# Altium PCB Copy of PCB1.PcbDoc (part 8 of 9)
Units mm, origin at the board's own origin, x right, y up, seen from the top; angles counter-clockwise.
Board outline 100 x 100 mm, 6 copper layers (Top Layer, Int1 (GND), Int2 (Sign), Int3 (Sign), Int4 (PWR), Bottom Layer), stack 1.538 mm thick; 614 components, 712 nets, 3013 pads, 501 vias.
Unrouted connection lines stored in the file: 259.
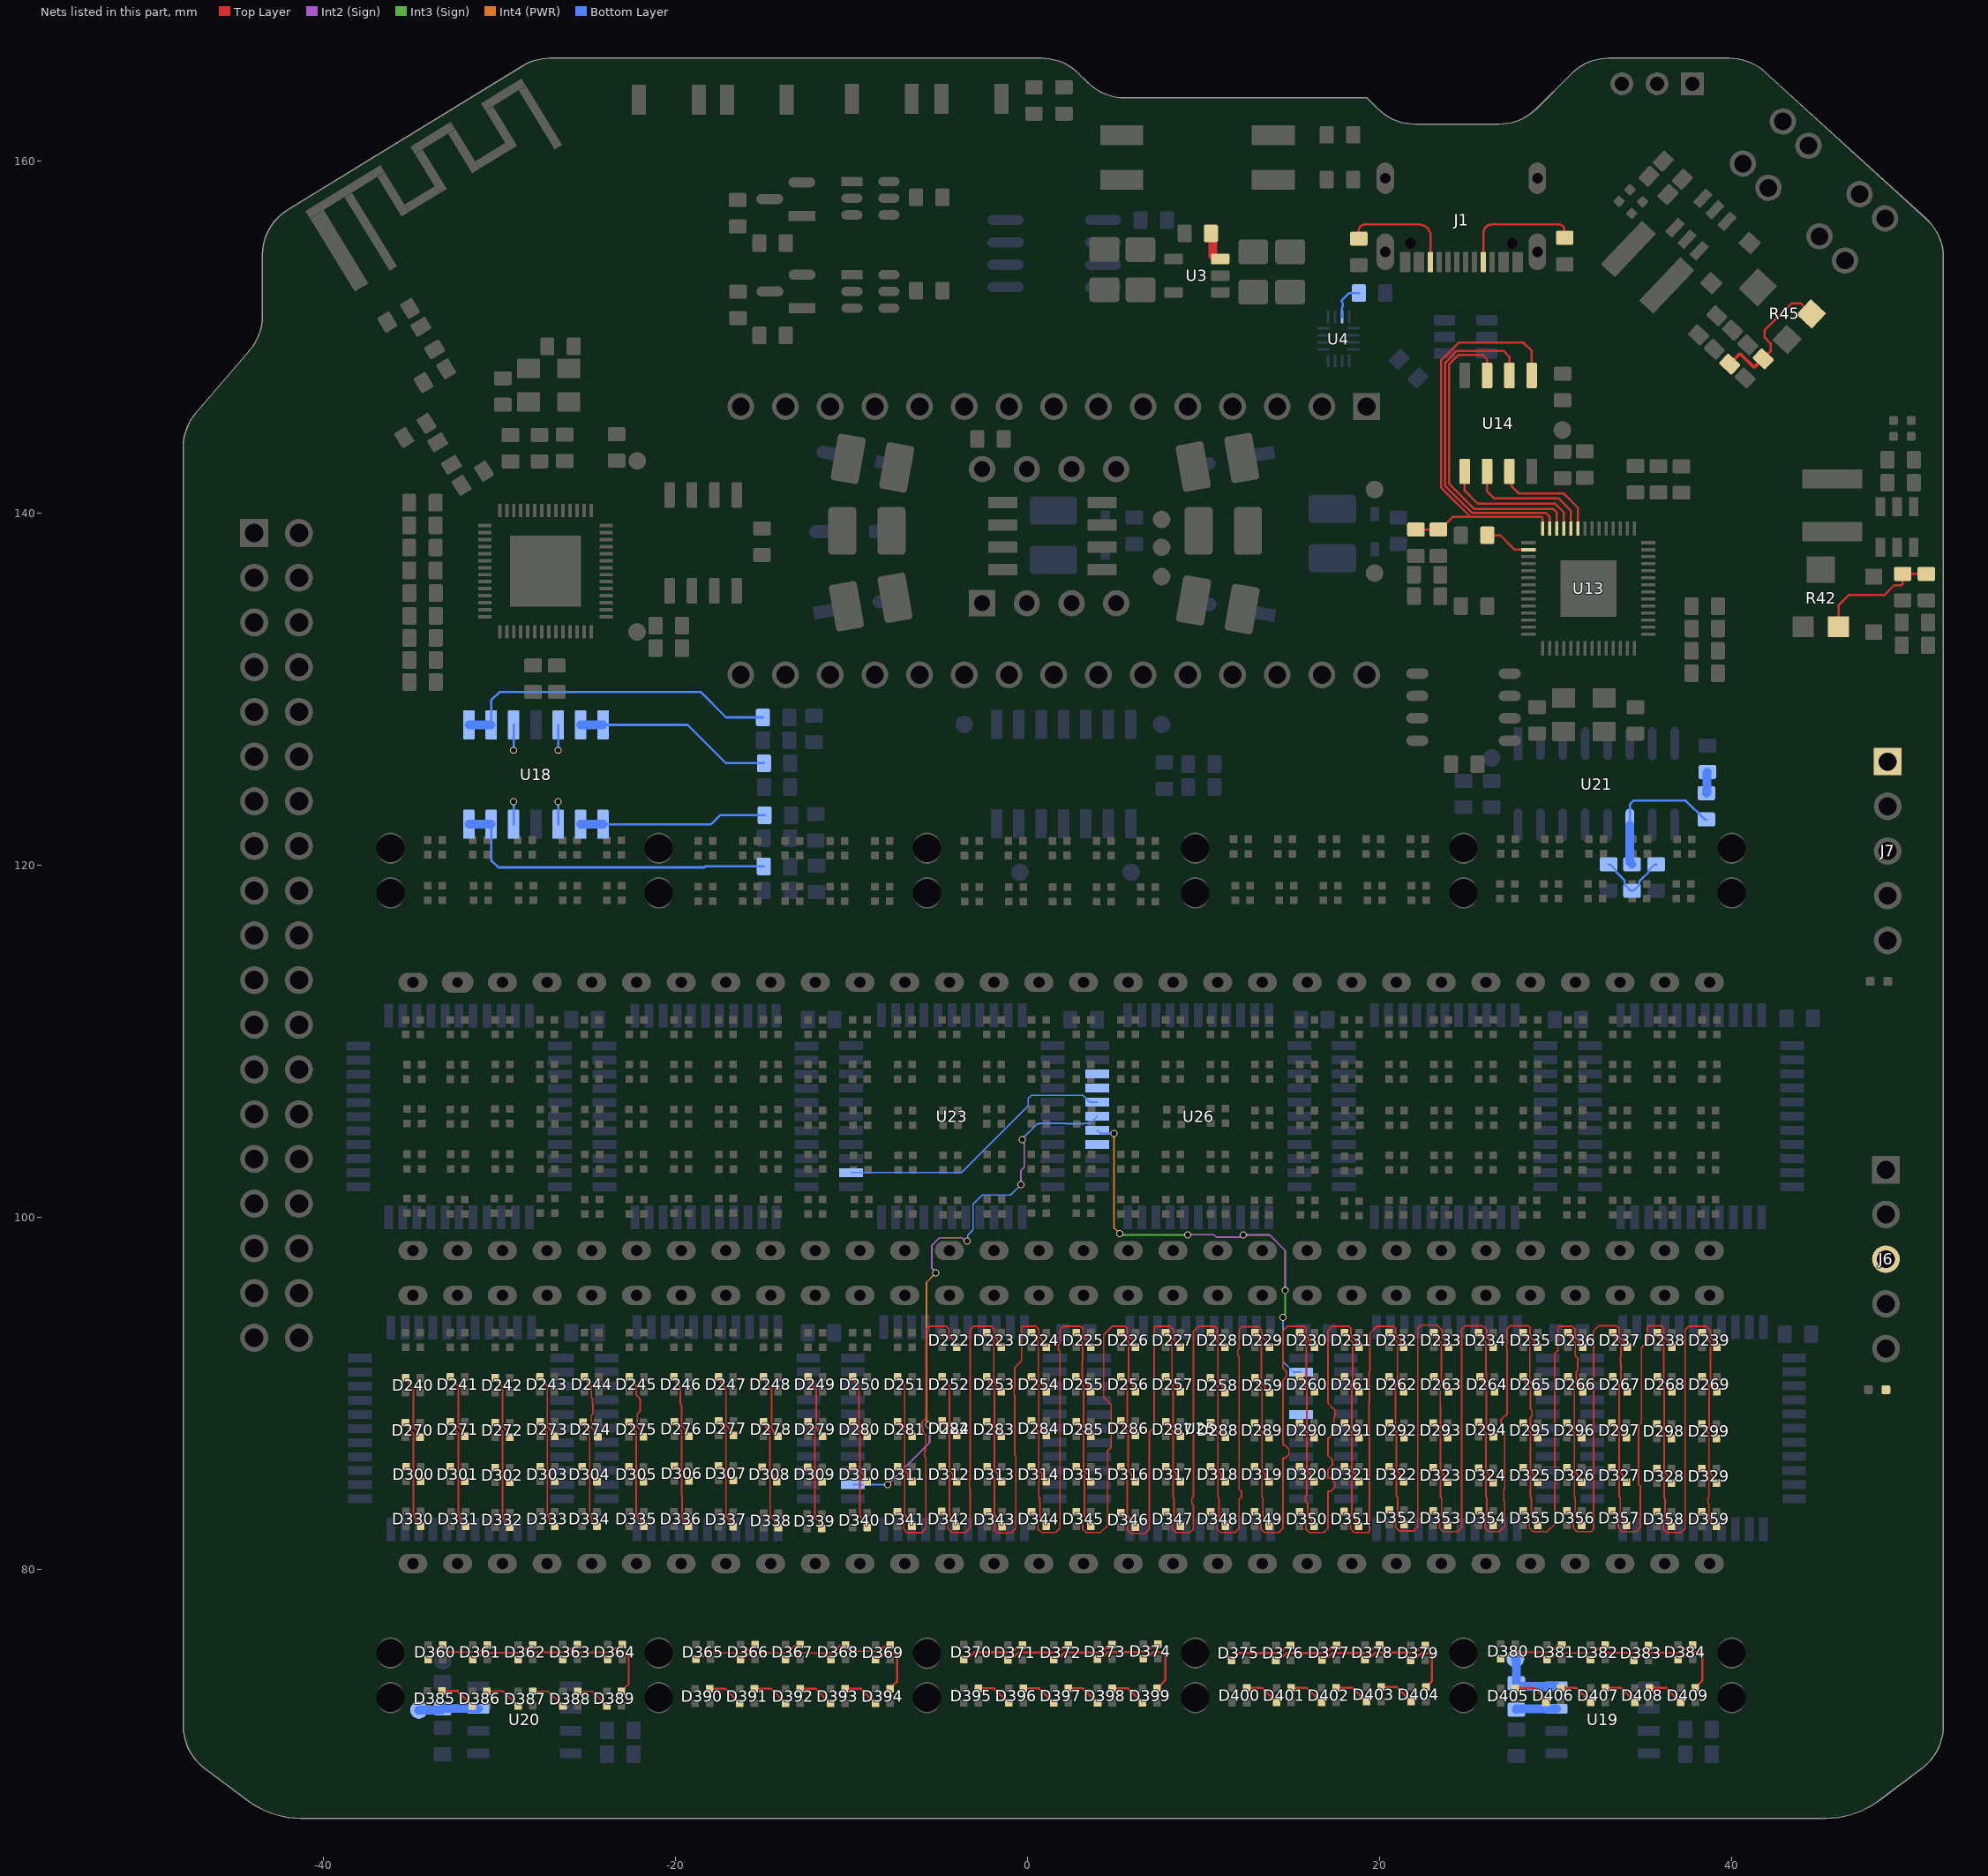
[diagram p11: the nets of this part, all layers, seen from the top]

## Via types
v1: diameter 0.4, hole 0.3, Top Layer to Bottom Layer, tented both sides, 494 vias
v2: diameter 0.4, hole 0.3, Top Layer to Bottom Layer, 5 vias
v3: diameter 0.4, hole 0.3, Top Layer to Bottom Layer, tented top, 1 vias
v4: diameter 0.6, hole 0.5, Top Layer to Bottom Layer, 1 vias

## Nets (pads, with @x,y where several pads share a name; then routed paths per layer and width w, separated by ;. In a path a pad name is that pad's centre, name@x,y a point inside that pad or via, vN(x,y) a via of type N, cw(c..) or ccw(c..) an arc to the next point about the centre after c; other vN are vias at no path point) (continued)
NetD222_3: D222.4 D341.1 | length 16.6
  Top Layer w0.09: D341.1@-7.41,83.273 -7.13,82.993 -7.13,82.938 -7.05,82.858 -7.05,82.297 -6.837,82.083 -6.042,82.083 -5.795,82.33 -5.795,86.327 -5.871,86.403 -5.871,86.711 -5.795,86.786 -5.795,87.643 -5.958,87.806 -5.958,88.02 -6.008,88.071 -6.008,88.379 -5.795,88.592 -5.795,93.605 -5.589,93.811 -4.611,93.811 -4.487,93.687 -4.487,93.263 -4.265,93.04 -4.265,92.761 -4.254,92.75 D222.4@-4.233,92.75
NetD223_1: D223.1 D253.4 | length 3.8
  Top Layer w0.09: D223.1@-2.397,93.461 -1.927,92.991 -1.927,90.799 -1.869,90.74 -1.869,90.64 -1.857,90.628 -1.857,90.518 -1.667,90.328 -1.667,90.27 D253.4@-1.48,90.083
NetD223_3: D223.4 D342.1 | length 16.4
  Top Layer w0.09: D342.1@-4.895,83.288 -4.615,83.008 -4.615,82.828 -4.535,82.748 -4.535,82.312 -4.322,82.098 -3.527,82.098 -3.28,82.345 -3.28,84.599 -3.311,84.63 -3.311,84.938 -3.311,85.089 -3.28,85.12 -3.28,93.62 -3.089,93.811 -2.071,93.811 -1.857,93.597 -1.857,93.19 -1.737,93.07 -1.737,92.785 -1.718,92.765
NetD224_1: D224.1 D254.4 | length 3.8
  Top Layer w0.09: D224.1@0.126,93.461 0.599,92.987 0.599,90.76 0.905,90.454 0.905,90.221 D254.4@1.043,90.083
NetD224_3: D224.4 D343.1 | length 16.3
  Top Layer w0.09: D343.1@-2.295,83.268 -2.015,82.988 -2.015,82.774 -1.893,82.652 -1.893,82.249 -1.722,82.078 -0.927,82.078 -0.68,82.325 -0.68,86.459 -0.739,86.518 -0.739,89.886 -0.782,89.929 -0.782,90.237 -0.739,90.28 -0.739,91.464 -0.35,91.854 -0.35,93.758 -0.297,93.811 0.469,93.811 0.628,93.652 0.628,93.228 0.884,92.971 D224.4@0.884,92.747
NetD225_1: D225.1 D255.4 | length 3.8
  Top Layer w0.09: D225.1@2.666,93.461 3.02,93.107 3.02,92.97 3.113,92.877 3.113,91.862 3.1,91.849 3.1,90.835 3.21,90.725 3.21,90.677 3.432,90.454 3.432,90.234 D255.4@3.583,90.083
NetD225_3: D225.4 D344.1 | length 16.4
  Top Layer w0.09: D344.1@0.213,83.283 0.493,83.003 0.493,82.948 0.573,82.868 0.573,82.307 0.786,82.093 1.581,82.093 1.828,82.34 1.828,92.38 1.738,92.47 1.738,92.778 1.828,92.868 1.828,93.636 2.003,93.811 3.009,93.811 3.136,93.684 3.136,93.26 3.358,93.037 3.358,92.771 3.369,92.76 D225.4@3.39,92.76
NetD226_1: D226.1 D256.4 | length 3.8
  Top Layer w0.09: D226.1@5.206,93.461 5.722,92.945 5.722,90.714 5.982,90.454 5.982,90.224 D256.4@6.123,90.083
NetD226_3: D226.4 D345.1 | length 16.6
  Top Layer w0.09: D345.1@2.753,83.283 3.033,83.003 3.033,82.789 3.113,82.709 3.113,82.307 3.326,82.093 4.121,82.093 4.53,82.502 4.53,86.725 4.74,86.935 4.74,87.718 4.722,87.736 4.722,88.066 4.738,88.083 4.738,89.357 4.306,89.789 4.306,93.324 4.793,93.811 5.549,93.811 5.653,93.707 5.653,93.305 5.95,93.008 D226.4@5.95,92.76
NetD227_1: D227.1 D257.4 | length 3.8
  Top Layer w0.09: D227.1@7.753,93.461 8.113,93.101 8.113,92.957 8.193,92.877 8.193,90.829 8.303,90.719 8.303,90.677 8.525,90.454 8.525,90.228 D257.4@8.67,90.083
NetD227_3: D227.4 D346.1 | length 16.4
  Top Layer w0.09: D346.1@5.293,83.233 5.463,83.063 5.463,82.957 5.573,82.847 5.573,82.739 5.653,82.659 5.653,82.257 5.866,82.043 6.661,82.043 6.908,82.29 6.908,87.825 6.961,87.878 6.968,87.878 7.186,88.095 7.186,93.758 7.239,93.811 8.089,93.811 8.303,93.597 8.303,93.038 8.438,92.902 8.438,92.721 8.449,92.71 D227.4@8.47,92.71
NetD228_1: D228.1 D258.4 | length 3.8
  Top Layer w0.09: D228.1@10.303,93.461 10.805,92.959 10.805,90.665 11.065,90.404 11.065,90.223 11.205,90.083 D258.4@11.22,90.083
NetD228_3: D228.4 D347.1 | length 16.4
  Top Layer w0.09: D347.1@7.84,83.283 8.12,83.003 8.12,82.948 8.2,82.868 8.2,82.307 8.413,82.093 9.208,82.093 9.418,82.303 9.418,83.651 9.324,83.745 9.324,84.053 9.418,84.147 9.418,93.525 9.703,93.811 10.629,93.811 10.763,93.677 10.763,93.27 11.017,93.015 D228.4@11.017,92.76
NetD229_1: D229.1 D259.4 | length 3.8
  Top Layer w0.09: D229.1@12.803,93.461 13.245,93.018 13.245,92.905 13.273,92.877 13.273,90.578 13.495,90.356 13.495,90.301 13.713,90.083 D259.4@13.72,90.083
NetD229_3: D229.4 D348.1 | length 16.4
  Top Layer w0.09: D348.1@10.39,83.283 10.67,83.003 10.67,82.948 10.75,82.868 10.75,82.307 10.963,82.093 11.758,82.093 12.005,82.34 12.005,83.968 12.148,84.111 12.148,84.419 12.005,84.562 12.005,92.082 11.927,92.16 11.927,92.468 12.005,92.547 12.005,93.615 12.181,93.791 13.099,93.791 13.313,93.577 13.313,93.22 13.567,92.965 D229.4@13.567,92.76
NetD230_1: D230.1 D260.4 | length 3.7
  Top Layer w0.09: D230.1@15.353,93.461 15.825,92.988 15.825,90.615 16.003,90.438 16.003,90.383 D260.4@16.27,90.116
NetD230_3: D230.4 D349.1 | length 16.9
  Top Layer w0.09: D349.1@12.89,83.283 13.17,83.003 13.17,82.948 13.25,82.868 13.25,82.307 13.463,82.093 14.258,82.093 14.505,82.34 14.505,86.317 14.618,86.317 14.836,86.535 14.836,86.843 14.618,87.061 14.505,87.061 14.505,90.768 14.685,90.948 14.685,91.256 14.505,91.436 14.505,93.581 14.735,93.811 15.709,93.811 15.813,93.707 15.813,93.27 16.035,93.047 16.035,92.771 16.046,92.76 16.067,92.76
NetD231_1: D231.1 D261.4 | length 3.8
  Top Layer w0.09: D231.1@17.903,93.461 18.463,92.901 18.463,90.677 18.685,90.454 18.685,90.218 D261.4@18.82,90.083
NetD231_3: D231.4 D350.1 | length 17.4
  Top Layer w0.09: D350.1@15.44,83.283 15.72,83.003 15.72,82.948 15.8,82.868 15.8,82.307 16.013,82.093 16.808,82.093 17.055,82.34 17.055,84.436 17.209,84.436 17.427,84.654 17.427,84.962 17.209,85.18 17.055,85.18 17.055,85.703 17.082,85.703 17.299,85.921 17.299,86.229 17.082,86.447 17.055,86.447 17.055,87.481 17.128,87.481 17.399,87.752 17.399,88.669 17.454,88.724 17.454,89.049 17.055,89.447 17.055,91.865 17.051,91.869 17.051,92.177 17.055,92.181 17.055,93.562 17.303,93.811 18.249,93.811 18.353,93.707 18.353,93.587 18.363,93.577 18.363,93.295 18.653,93.005 D231.4@18.653,92.76
NetD232_1: D232.1 D262.4 | length 3.8
  Top Layer w0.09: D232.1@20.446,93.461 21.003,92.904 21.003,90.677 21.225,90.454 21.225,90.221 D262.4@21.363,90.083
NetD232_3: D232.4 D351.1 | length 16.4
  Top Layer w0.09: D351.1@17.975,83.288 18.255,83.008 18.255,82.953 18.377,82.831 18.377,82.756 18.335,82.714 18.335,82.312 18.548,82.098 19.339,82.098 19.41,82.169 19.41,87.908 19.392,87.926 19.392,89.483 19.41,89.501 19.41,90.427 19.399,90.437 19.399,90.601 19.392,90.609 19.392,91.195 19.437,91.24 19.437,93.414 19.833,93.811 20.789,93.811 20.893,93.707 20.893,93.587 20.898,93.582 20.898,93.3 21.193,93.005 D232.4@21.193,92.765
NetD233_1: D233.1 D263.4 | length 3.8
  Top Layer w0.09: D233.1@22.953,93.421 23.493,92.881 23.493,90.727 23.765,90.454 23.765,90.148 D263.4@23.87,90.043
NetD233_3: D233.4 D352.1 | length 16.6
  Top Layer w0.09: D352.1@20.54,83.373 20.82,83.093 20.82,83.038 20.9,82.958 20.9,82.397 21.113,82.183 21.908,82.183 22.155,82.43 22.155,93.705 22.331,93.881 23.249,93.881 23.319,93.811 23.329,93.811 23.433,93.707 23.433,93.697 23.543,93.587 23.543,93.195 23.685,93.052 23.685,92.861 D233.4@23.925,92.621
NetD234_1: D234.1 D264.4 | length 3.8
  Top Layer w0.09: D234.1@25.526,93.406 26.028,92.904 26.028,91.211 26.05,91.189 26.05,90.787 26.24,90.597 26.24,90.383 26.443,90.18 D264.4@26.443,90.028
NetD234_3: D234.4 D353.1 | length 16.6
  Top Layer w0.09: D353.1@23.04,83.333 23.32,83.053 23.32,82.998 23.4,82.918 23.4,82.357 23.613,82.143 24.408,82.143 24.655,82.39 24.655,89.101 24.644,89.113 24.644,89.421 24.655,89.432 24.655,93.665 24.831,93.841 25.839,93.841 26.083,93.597 26.083,93.195 26.218,93.06 26.218,92.846 D234.4@26.443,92.621
NetD235_1: D235.1 D265.4 | length 3.7
  Top Layer w0.09: D235.1@28.053,93.421 28.523,92.951 28.523,90.759 28.581,90.7 28.581,90.6 28.745,90.436 28.745,90.341 D265.4@28.97,90.116
NetD235_3: D235.4 D354.1 | length 16.7
  Top Layer w0.09: D354.1@25.613,83.333 25.893,83.053 25.893,82.998 25.973,82.918 25.973,82.357 26.186,82.143 26.803,82.143 27.094,82.433 27.094,83.839 27.049,83.885 27.049,84.534 27.094,84.579 27.094,87.812 27.042,87.863 27.042,87.882 26.878,88.046 26.878,88.46 26.885,88.466 26.885,88.523 27.103,88.741 27.16,88.741 27.228,88.809 27.228,92.512 27.211,92.529 27.211,92.837 27.228,92.853 27.228,93.665 27.404,93.841 28.44,93.841 28.536,93.745 28.536,93.225 28.758,93.002 28.758,92.821 D235.4@28.958,92.621
NetD236_1: D236.1 D266.4 | length 3.8
  Top Layer w0.09: D236.1@30.553,93.421 31.106,92.868 31.106,92.144 31.25,92 31.25,91.483 31.257,91.475 31.257,91.321 31.163,91.227 31.163,90.677 31.385,90.454 31.385,90.128 D266.4@31.47,90.043
NetD236_3: D236.4 D355.1 | length 16.4
  Top Layer w0.09: D355.1@28.14,83.333 28.42,83.053 28.42,82.998 28.5,82.918 28.5,82.357 28.713,82.143 29.508,82.143 29.938,82.573 29.938,92.265 30.124,92.451 30.124,93.758 30.176,93.811 30.949,93.811 31.089,93.67 31.089,93.198 31.296,92.992 31.296,92.848 D236.4@31.523,92.621
NetD237_1: D237.1 D267.4 | length 3.7
  Top Layer w0.09: D237.1@33.103,93.421 33.703,92.821 33.703,92.07 33.681,92.048 33.681,91.74 33.703,91.718 33.703,90.677 33.783,90.597 33.783,90.383 D267.4@34.02,90.146
NetD237_3: D237.4 D356.1 | length 16.3
  Top Layer w0.09: D356.1@30.64,83.333 30.92,83.053 30.92,82.998 31,82.918 31,82.357 31.213,82.143 32.008,82.143 32.146,82.281 32.146,93.556 32.431,93.841 33.459,93.841 33.593,93.707 33.593,93.2 33.893,92.9 D237.4@33.893,92.81
NetD238_1: D238.1 D268.4 | length 3.6
  Top Layer w0.09: D238.1@35.653,93.371 36.133,92.891 36.133,90.699 36.433,90.399 36.433,90.273 D268.4@36.57,90.136
NetD238_3: D238.4 D357.1 | length 16.5
  Top Layer w0.09: D357.1@33.19,83.333 33.47,83.053 33.47,82.998 33.55,82.918 33.55,82.357 33.763,82.143 34.558,82.143 34.805,82.39 34.805,84.727 34.697,84.836 34.697,88.178 34.864,88.345 34.864,92.601 35.204,92.94 35.204,93.788 35.256,93.841 35.999,93.841 36.133,93.707 36.133,93.205 36.449,92.889 36.449,92.775 D238.4@36.603,92.621
NetD239_1: D239.1 D269.4 | length 3.7
  Top Layer w0.09: D239.1@38.313,93.451 38.593,93.171 38.593,93.116 38.783,92.926 38.783,90.677 39.005,90.454 39.005,90.241 D269.4@39.12,90.126
NetD239_3: D239.4 D358.1 | length 16.4
  Top Layer w0.09: D358.1@35.74,83.283 36.02,83.003 36.02,82.948 36.1,82.868 36.1,82.307 36.313,82.093 37.108,82.093 37.344,82.329 37.344,93.604 37.551,93.811 38.569,93.811 38.783,93.597 38.783,93.195 38.973,93.005 D239.4@38.973,92.76
NetD240_1: D240.1 D270.4 | length 3.5
  Top Layer w0.09: D240.1@-35.324,90.888 -35.183,90.747 -35.183,90.533 -34.909,90.259 -34.909,88.096 -34.787,87.973 -34.721,87.907 -34.685,87.907 -34.632,87.854 -34.632,87.703 -34.602,87.673 D270.4@-34.594,87.673
NetD241_1: D241.1 D271.4 | length 3.5
  Top Layer w0.09: D241.1@-32.76,90.883 -32.757,90.883 -32.637,90.763 -32.637,90.76 -32.527,90.65 -32.527,90.598 -32.345,90.416 -32.345,88.091 -32.223,87.968 -32.157,87.902 -32.121,87.902 -32.068,87.849 -32.068,87.698 -32.038,87.668 D271.4@-32.03,87.668
NetD242_1: D242.1 D272.4 | length 3.5
  Top Layer w0.09: D242.1@-30.26,90.833 -30.223,90.833 -30.103,90.713 -30.103,90.626 -29.846,90.369 -29.846,88.132 -29.568,87.854 -29.568,87.655 D272.4@-29.53,87.618
NetD243_1: D243.1 D273.4 | length 3.6
  Top Layer w0.09: D243.1@-27.71,90.883 -27.677,90.883 -27.557,90.763 -27.557,90.73 -27.447,90.62 -27.447,90.598 -27.295,90.446 -27.295,88.091 -27.173,87.968 -27.107,87.902 -27.071,87.902 -27.018,87.849 -27.018,87.698 -26.988,87.668 D273.4@-26.98,87.668
NetD244_1: D244.1 D274.4 | length 3.5
  Top Layer w0.09: D244.1@-25.192,90.913 -25.042,90.763 -25.042,90.656 -24.79,90.404 -24.79,89.775 -24.73,89.715 -24.73,89.417 -24.704,89.391 -24.704,88.854 -24.79,88.768 -24.79,88.051 -24.618,87.879 -24.618,87.728 -24.588,87.698 D274.4@-24.58,87.698
NetD245_1: D245.1 D275.4 | length 3.7
  Top Layer w0.09: D245.1@-22.627,90.913 -22.507,90.793 -22.507,90.76 -22.397,90.65 -22.397,90.628 -22.245,90.476 -22.245,89.915 -22.029,89.698 -22.029,88.988 -22.19,88.826 -22.19,88.117 -21.968,87.894 -21.968,87.713 -21.953,87.698 D275.4@-21.93,87.698
NetD246_1: D246.1 D276.4 | length 3.5
  Top Layer w0.09: D246.1@-20.078,90.95 -19.97,90.841 -19.97,90.581 -19.747,90.359 -19.747,89.407 -19.663,89.323 -19.663,88.157 -19.541,88.035 -19.475,87.969 -19.439,87.969 -19.386,87.916 -19.386,87.765 -19.356,87.734 D276.4@-19.348,87.734
NetD247_1: D247.1 D277.4 | length 3.5
  Top Layer w0.09: D247.1@-17.564,90.974 -17.455,90.865 -17.455,90.605 -17.313,90.463 -17.311,90.463 -17.207,90.359 -17.207,90.357 -17.149,90.299 -17.149,88.182 -17.026,88.059 -16.96,87.993 -16.925,87.993 -16.872,87.94 -16.872,87.789 -16.842,87.759 D277.4@-16.834,87.759
NetD248_1: D248.1 D278.4 | length 3.6
  Top Layer w0.09: D248.1@-15.085,90.9 -15.027,90.9 -14.89,90.763 -14.89,90.581 -14.557,90.249 -14.557,87.995 -14.481,87.919 -14.481,87.909 -14.46,87.888 -14.46,87.782 -14.363,87.685 D278.4@-14.355,87.685
NetD249_1: D249.1 D279.4 | length 3.5
  Top Layer w0.09: D249.1@-12.513,90.905 -12.404,90.796 -12.404,90.636 -12.017,90.249 -12.017,88.032 -11.821,87.836 -11.821,87.723 -11.788,87.69 D279.4@-11.783,87.69
NetD250_1: D250.1 D280.4 | length 3.5
  Top Layer w0.09: D250.1@-9.927,90.913 -9.81,90.795 -9.81,90.581 -9.587,90.359 -9.587,88.163 -9.423,87.998 -9.357,87.932 -9.321,87.932 -9.268,87.879 -9.268,87.728 -9.238,87.698 D280.4@-9.23,87.698
NetD251_1: D251.1 D281.4 | length 3.5
  Top Layer w0.09: D251.1@-7.387,90.913 -7.237,90.763 -7.237,90.708 -6.992,90.463 -6.992,88.121 -6.87,87.998 -6.804,87.932 -6.768,87.932 -6.715,87.879 -6.715,87.728 -6.685,87.698 D281.4@-6.677,87.698
NetD252_1: D252.1 D282.4 | length 3.5
  Top Layer w0.09: D252.1@-4.847,90.913 -4.697,90.763 -4.697,90.743 -4.587,90.633 -4.587,90.598 -4.452,90.463 -4.452,88.121 -4.33,87.998 -4.264,87.932 -4.228,87.932 -4.175,87.879 -4.175,87.728 -4.145,87.698 D282.4@-4.137,87.698
NetD253_1: D253.1 D283.4 | length 3.5
  Top Layer w0.09: D253.1@-2.31,90.913 -2.202,90.804 -2.202,90.593 -2.071,90.463 -1.895,90.287 -1.895,88.121 -1.773,87.998 -1.707,87.932 -1.671,87.932 -1.618,87.879 -1.618,87.728 -1.588,87.698 D283.4@-1.58,87.698
NetD254_1: D254.1 D284.4 | length 3.5
  Top Layer w0.09: D254.1@0.233,90.913 0.383,90.763 0.383,90.708 0.628,90.463 0.628,88.121 0.75,87.998 0.816,87.932 0.852,87.932 0.905,87.879 0.905,87.728 0.935,87.698 D284.4@0.943,87.698
NetD255_1: D255.1 D285.4 | length 3.5
  Top Layer w0.09: D255.1@2.753,90.913 2.76,90.913 2.91,90.763 2.91,90.756 3.02,90.646 3.02,90.598 3.168,90.45 3.168,88.121 3.29,87.998 3.356,87.932 3.392,87.932 3.445,87.879 3.445,87.728 3.475,87.698 D285.4@3.483,87.698
NetD256_1: D256.1 D286.4 | length 3.5
  Top Layer w0.09: D256.1@5.31,90.913 5.532,90.691 5.532,90.636 5.624,90.544 5.624,90.385 5.656,90.353 5.656,88.172 5.83,87.998 5.896,87.932 5.932,87.932 5.985,87.879 5.985,87.728 6.015,87.698 D286.4@6.023,87.698
NetD257_1: D257.1 D287.4 | length 3.6
  Top Layer w0.09: D257.1@7.84,90.913 7.853,90.913 8.003,90.763 8.003,90.75 8.113,90.64 8.113,90.598 8.255,90.456 8.255,88.121 8.377,87.998 8.443,87.932 8.479,87.932 8.532,87.879 8.532,87.728 8.562,87.698 D287.4@8.57,87.698
NetD258_1: D258.1 D288.4 | length 3.5
  Top Layer w0.09: D258.1@10.39,90.913 10.39,90.866 10.543,90.713 10.543,90.658 10.805,90.396 10.805,88.121 10.927,87.998 10.993,87.932 11.029,87.932 11.082,87.879 11.082,87.728 11.112,87.698 D288.4@11.12,87.698
NetD259_1: D259.1 D289.4 | length 3.5
  Top Layer w0.09: D259.1@12.89,90.906 13.05,90.745 13.05,90.531 13.305,90.277 13.305,88.121 13.427,87.998 13.493,87.932 13.529,87.932 13.582,87.879 13.582,87.728 13.612,87.698 D289.4@13.62,87.698
NetD260_1: D260.1 D290.4 | length 3.5
  Top Layer w0.09: D260.1@15.44,90.913 15.59,90.763 15.59,90.581 15.813,90.359 15.813,90.304 15.855,90.262 15.855,88.121 15.977,87.998 16.043,87.932 16.079,87.932 16.132,87.879 16.132,87.728 16.162,87.698 D290.4@16.17,87.698
NetD261_1: D261.1 D291.4 | length 3.6
  Top Layer w0.09: D261.1@17.99,90.913 18.013,90.913 18.163,90.763 18.163,90.74 18.273,90.63 18.273,90.598 18.405,90.466 18.405,88.121 18.527,87.998 18.593,87.932 18.629,87.932 18.682,87.879 18.682,87.728 18.712,87.698 D291.4@18.72,87.698
NetD262_1: D262.1 D292.4 | length 3.5
  Top Layer w0.09: D262.1@20.533,90.913 20.553,90.913 20.703,90.763 20.703,90.743 20.813,90.633 20.813,90.598 20.893,90.518 20.893,88.586 20.9,88.579 20.9,88.169 21.07,87.998 21.225,87.843 21.225,87.735 D292.4@21.263,87.698
NetD263_1: D263.1 D293.4 | length 3.6
  Top Layer w0.09: D263.1@23.04,90.873 23.127,90.873 23.237,90.763 23.237,90.675 23.433,90.48 23.433,89.268 23.455,89.246 23.455,88.081 23.577,87.958 23.643,87.892 23.679,87.892 23.732,87.839 23.732,87.688 23.762,87.658 D293.4@23.77,87.658
NetD264_1: D264.1 D294.4 | length 3.6
  Top Layer w0.09: D264.1@25.613,90.858 25.711,90.858 25.806,90.763 25.806,90.665 26.05,90.421 26.05,88.044 26.15,87.943 26.216,87.877 26.252,87.877 26.305,87.824 26.305,87.673 26.335,87.643 D294.4@26.343,87.643
NetD265_1: D265.1 D295.4 | length 3.6
  Top Layer w0.09: D265.1@28.14,90.873 28.248,90.764 28.248,90.623 28.555,90.317 28.555,89.11 28.646,89.019 28.646,88.711 28.555,88.62 28.555,88.081 28.677,87.958 28.743,87.892 28.779,87.892 28.832,87.839 28.832,87.688 28.862,87.658 D295.4@28.87,87.658
NetD266_1: D266.1 D296.4 | length 3.6
  Top Layer w0.09: D266.1@30.64,90.873 30.753,90.873 30.863,90.763 30.863,90.653 30.971,90.545 30.971,90.441 31.053,90.359 31.053,89.248 31.055,89.246 31.055,88.081 31.177,87.958 31.243,87.892 31.279,87.892 31.332,87.839 31.332,87.688 31.362,87.658 D296.4@31.37,87.658
NetD267_1: D267.1 D297.4 | length 3.6
  Top Layer w0.09: D267.1@33.19,90.873 33.293,90.873 33.403,90.763 33.403,90.708 33.593,90.518 33.593,89.847 33.605,89.835 33.605,88.081 33.727,87.958 33.793,87.892 33.829,87.892 33.882,87.839 33.882,87.688 33.912,87.658 D297.4@33.92,87.658
NetD268_1: D268.1 D298.4 | length 3.6
  Top Layer w0.09: D268.1@35.74,90.823 35.852,90.823 35.912,90.763 35.912,90.579 36.155,90.337 36.155,88.031 36.277,87.908 36.343,87.842 36.379,87.842 36.432,87.789 36.432,87.638 36.462,87.608 D298.4@36.47,87.608
NetD269_1: D269.1 D299.4 | length 3.5
  Top Layer w0.09: D269.1@38.397,90.823 38.423,90.823 38.483,90.763 38.483,90.737 38.593,90.627 38.593,90.598 38.72,90.471 38.72,88.015 38.893,87.842 38.929,87.842 38.982,87.789 38.982,87.638 39.012,87.608 D299.4@39.02,87.608
NetD270_1: D270.1 D300.4 | length 3.6
  Top Layer w0.09: D270.1@-35.324,88.363 -35.19,88.229 -35.19,88.015 -34.909,87.734 -34.909,85.652 -34.844,85.586 -34.844,85.571 -34.719,85.446 -34.719,85.193 -34.6,85.074 D300.4@-34.6,85.065
NetD271_1: D271.1 D301.4 | length 3.6
  Top Layer w0.09: D271.1@-32.76,88.358 -32.626,88.224 -32.626,88.01 -32.345,87.729 -32.345,85.647 -32.34,85.642 -32.34,85.577 -32.26,85.497 -32.26,85.293 -32.15,85.183 -32.15,85.173 D301.4@-32.037,85.059
NetD272_1: D272.1 D302.4 | length 3.6
  Top Layer w0.09: D272.1@-30.235,88.308 -30.036,88.109 -30.036,88.054 -29.845,87.863 -29.845,85.597 -29.78,85.531 -29.78,85.516 -29.655,85.391 -29.655,85.138 -29.536,85.019 D302.4@-29.536,85.009
NetD273_1: D273.1 D303.4 | length 3.6
  Top Layer w0.09: D273.1@-27.71,88.358 -27.576,88.224 -27.576,88.071 -27.295,87.79 -27.295,85.647 -27.23,85.581 -27.23,85.566 -27.105,85.441 -27.105,85.188 -26.986,85.069 D303.4@-26.986,85.059
NetD274_1: D274.1 D304.4 | length 3.6
  Top Layer w0.09: D274.1@-25.31,88.388 -25.176,88.254 -25.176,88.101 -24.895,87.82 -24.895,85.677 -24.84,85.622 -24.84,85.567 -24.705,85.432 -24.705,85.218 -24.586,85.099 D304.4@-24.586,85.089
NetD275_1: D275.1 D305.4 | length 3.6
  Top Layer w0.09: D275.1@-22.66,88.388 -22.526,88.254 -22.526,88.101 -22.245,87.82 -22.245,85.677 -22.19,85.622 -22.19,85.567 -22.055,85.432 -22.055,85.218 -21.936,85.099 D305.4@-21.936,85.089
NetD276_1: D276.1 D306.4 | length 3.6
  Top Layer w0.09: D276.1@-20.078,88.425 -19.945,88.291 -19.945,88.138 -19.663,87.857 -19.663,85.713 -19.608,85.658 -19.608,85.604 -19.473,85.469 -19.473,85.255 -19.355,85.136 D306.4@-19.355,85.126
NetD277_1: D277.1 D307.4 | length 3.6
  Top Layer w0.09: D277.1@-17.564,88.449 -17.43,88.315 -17.43,88.162 -17.149,87.881 -17.149,85.738 -17.094,85.683 -17.094,85.628 -16.959,85.493 -16.959,85.279 -16.84,85.16 D307.4@-16.84,85.151
NetD278_1: D278.1 D308.4 | length 3.6
  Top Layer w0.09: D278.1@-15.035,88.375 -14.873,88.213 -14.873,88.031 -14.65,87.809 -14.65,85.644 -14.615,85.609 -14.615,85.554 -14.393,85.331 -14.393,85.108 D308.4@-14.361,85.077
NetD279_1: D279.1 D309.4 | length 3.6
  Top Layer w0.09: D279.1@-12.513,88.38 -12.379,88.246 -12.379,88.093 -12.098,87.812 -12.098,85.669 -12.043,85.614 -12.043,85.559 -11.908,85.424 -11.908,85.21 -11.789,85.091 D309.4@-11.789,85.082
NetD280_1: D280.1 D310.4 | length 3.6
  Top Layer w0.09: D280.1@-9.96,88.388 -9.826,88.254 -9.826,88.101 -9.545,87.82 -9.545,85.677 -9.49,85.622 -9.49,85.567 -9.355,85.432 -9.355,85.218 -9.236,85.099 D310.4@-9.236,85.089
NetD281_1: D281.1 D311.4 | length 3.6
  Top Layer w0.09: D281.1@-7.407,88.388 -7.273,88.254 -7.273,88.101 -6.992,87.82 -6.992,85.677 -6.937,85.622 -6.937,85.567 -6.802,85.432 -6.802,85.218 -6.683,85.099 D311.4@-6.683,85.089
NetD282_1: D282.1 D312.4 | length 3.6
  Top Layer w0.09: D282.1@-4.867,88.388 -4.733,88.254 -4.733,88.101 -4.452,87.82 -4.452,85.677 -4.397,85.622 -4.397,85.567 -4.262,85.432 -4.262,85.218 -4.143,85.099 D312.4@-4.143,85.089
NetD283_1: D283.1 D313.4 | length 3.6
  Top Layer w0.09: D283.1@-2.31,88.388 -2.176,88.254 -2.176,88.101 -1.895,87.82 -1.895,85.677 -1.84,85.622 -1.84,85.567 -1.705,85.432 -1.705,85.218 -1.586,85.099 D313.4@-1.586,85.089
NetD284_1: D284.1 D314.4 | length 3.6
  Top Layer w0.09: D284.1@0.213,88.388 0.347,88.254 0.347,88.101 0.628,87.82 0.628,85.677 0.683,85.622 0.683,85.567 0.818,85.432 0.818,85.218 0.937,85.099 D314.4@0.937,85.089
NetD285_1: D285.1 D315.4 | length 3.6
  Top Layer w0.09: D285.1@2.753,88.388 2.887,88.254 2.887,88.101 3.168,87.82 3.168,85.677 3.223,85.622 3.223,85.567 3.445,85.344 3.445,85.121 D315.4@3.477,85.089
NetD286_1: D286.1 D316.4 | length 3.6
  Top Layer w0.09: D286.1@5.293,88.388 5.427,88.254 5.427,88.101 5.708,87.82 5.708,85.677 5.763,85.622 5.763,85.567 5.898,85.432 5.898,85.218 6.017,85.099 D316.4@6.017,85.089
NetD287_1: D287.1 D317.4 | length 3.6
  Top Layer w0.09: D287.1@7.84,88.388 7.974,88.254 7.974,88.101 8.255,87.82 8.255,85.677 8.31,85.622 8.31,85.567 8.445,85.432 8.445,85.218 8.564,85.099 D317.4@8.564,85.089
NetD288_1: D288.1 D318.4 | length 3.6
  Top Layer w0.09: D288.1@10.39,88.388 10.524,88.254 10.524,88.101 10.805,87.82 10.805,85.677 10.86,85.622 10.86,85.567 10.995,85.432 10.995,85.218 11.114,85.099 D318.4@11.114,85.089
NetD289_1: D289.1 D319.4 | length 3.6
  Top Layer w0.09: D289.1@12.89,88.388 13.024,88.254 13.024,88.101 13.305,87.82 13.305,85.677 13.36,85.622 13.36,85.567 13.495,85.432 13.495,85.218 13.614,85.099 D319.4@13.614,85.089
NetD290_1: D290.1 D320.4 | length 3.6
  Top Layer w0.09: D290.1@15.44,88.388 15.574,88.254 15.574,88.101 15.855,87.82 15.855,85.677 15.91,85.622 15.91,85.567 16.045,85.432 16.045,85.218 16.164,85.099 D320.4@16.164,85.089
NetD291_1: D291.1 D321.4 | length 3.6
  Top Layer w0.09: D291.1@17.99,88.388 18.124,88.254 18.124,88.101 18.405,87.82 18.405,85.677 18.46,85.622 18.46,85.567 18.595,85.432 18.595,85.218 18.714,85.099 D321.4@18.714,85.089
NetD292_1: D292.1 D322.4 | length 3.6
  Top Layer w0.09: D292.1@20.533,88.388 20.667,88.254 20.667,88.101 20.948,87.82 20.948,85.677 21.003,85.622 21.003,85.567 21.138,85.432 21.138,85.218 21.257,85.099 D322.4@21.257,85.089
NetD293_1: D293.1 D323.4 | length 3.6
  Top Layer w0.09: D293.1@23.04,88.348 23.174,88.214 23.174,88.061 23.455,87.78 23.455,85.637 23.51,85.582 23.51,85.527 23.645,85.392 23.645,85.178 23.764,85.059 D323.4@23.764,85.049
NetD294_1: D294.1 D324.4 | length 3.6
  Top Layer w0.09: D294.1@25.613,88.333 25.747,88.199 25.747,88.046 26.028,87.765 26.028,85.622 26.083,85.567 26.083,85.512 26.218,85.377 26.218,85.163 26.337,85.044 D324.4@26.337,85.035
NetD295_1: D295.1 D325.4 | length 3.6
  Top Layer w0.09: D295.1@28.14,88.348 28.274,88.214 28.274,88.061 28.555,87.78 28.555,85.637 28.61,85.582 28.61,85.527 28.745,85.392 28.745,85.178 28.864,85.059 D325.4@28.864,85.049
NetD296_1: D296.1 D326.4 | length 3.6
  Top Layer w0.09: D296.1@30.64,88.348 30.774,88.214 30.774,88.061 31.055,87.78 31.055,85.637 31.11,85.582 31.11,85.527 31.245,85.392 31.245,85.178 31.364,85.059 D326.4@31.364,85.049
NetD297_1: D297.1 D327.4 | length 3.6
  Top Layer w0.09: D297.1@33.19,88.348 33.324,88.214 33.324,88.061 33.605,87.78 33.605,85.637 33.66,85.582 33.66,85.527 33.795,85.392 33.795,85.178 33.914,85.059 D327.4@33.914,85.049
NetD298_1: D298.1 D328.4 | length 3.6
  Top Layer w0.09: D298.1@35.74,88.298 35.874,88.164 35.874,88.011 36.155,87.73 36.155,85.587 36.21,85.532 36.21,85.477 36.345,85.342 36.345,85.128 36.464,85.009 D328.4@36.464,84.999
NetD299_1: D299.1 D329.4 | length 3.6
  Top Layer w0.09: D299.1@38.29,88.298 38.424,88.164 38.424,88.011 38.705,87.73 38.705,85.587 38.76,85.532 38.76,85.477 38.895,85.342 38.895,85.128 39.014,85.009 D329.4@39.014,84.999
NetD300_1: D300.1 D330.4 | length 3.7
  Top Layer w0.09: D300.1@-35.324,85.798 -35.285,85.798 -35.144,85.657 -35.144,85.617 -35.034,85.507 -35.034,85.492 -34.909,85.368 -34.909,83.142 -34.854,83.087 -34.854,82.998 -34.774,82.918 -34.774,82.738 D330.4@-34.494,82.458
NetD301_1: D301.1 D331.4 | length 3.7
  Top Layer w0.09: D301.1@-32.76,85.783 -32.53,85.553 -32.53,85.339 -32.45,85.259 -32.45,85.214 -32.345,85.109 -32.345,83.137 -32.29,83.082 -32.29,82.993 -32.21,82.913 -32.21,82.733 D331.4@-31.93,82.453
NetD302_1: D302.1 D332.4 | length 3.7
  Top Layer w0.09: D302.1@-30.26,85.743 -30.221,85.743 -30.08,85.602 -30.08,85.562 -29.97,85.452 -29.97,85.437 -29.845,85.313 -29.845,83.087 -29.79,83.032 -29.79,82.943 -29.71,82.863 -29.71,82.683 D332.4@-29.43,82.403
NetD303_1: D303.1 D333.4 | length 3.7
  Top Layer w0.09: D303.1@-27.71,85.793 -27.671,85.793 -27.53,85.652 -27.53,85.612 -27.42,85.502 -27.42,85.487 -27.295,85.363 -27.295,83.137 -27.24,83.082 -27.24,82.993 -27.16,82.913 -27.16,82.733 D333.4@-26.88,82.453
NetD304_1: D304.1 D334.4 | length 3.7
  Top Layer w0.09: D304.1@-25.31,85.823 -25.03,85.543 -25.03,85.488 -24.895,85.353 -24.895,83.167 -24.84,83.112 -24.84,83.023 -24.76,82.943 -24.76,82.763 D334.4@-24.48,82.483
NetD305_1: D305.1 D335.4 | length 3.7
  Top Layer w0.09: D305.1@-22.66,85.823 -22.38,85.543 -22.38,85.488 -22.245,85.353 -22.245,83.167 -22.177,83.099 -22.177,83.027 -21.955,82.804 -21.955,82.608 D335.4@-21.83,82.483
NetD306_1: D306.1 D336.4 | length 3.7
  Top Layer w0.09: D306.1@-20.078,85.86 -19.798,85.58 -19.798,85.525 -19.663,85.39 -19.663,84.22 -19.64,84.197 -19.64,83.027 -19.56,82.947 -19.528,82.915 -19.528,82.8 D336.4@-19.248,82.52
NetD307_1: D307.1 D337.4 | length 3.7
  Top Layer w0.09: D307.1@-17.564,85.884 -17.284,85.604 -17.284,85.549 -17.149,85.414 -17.149,83.11 -17.097,83.058 -17.097,83.004 -17.014,82.92 -17.014,82.824 D337.4@-16.734,82.544
NetD308_1: D308.1 D338.4 | length 3.7
  Top Layer w0.09: D308.1@-15.085,85.81 -14.805,85.53 -14.805,85.316 -14.646,85.157 -14.646,83.102 -14.536,82.992 -14.536,82.937 -14.313,82.715 -14.313,82.528 D338.4@-14.255,82.47
NetD309_1: D309.1 D339.4 | length 3.8
  Top Layer w0.09: D309.1@-12.513,85.815 -12.233,85.535 -12.233,85.48 -12.098,85.345 -12.098,82.99 -12.064,82.955 -12.064,82.901 -11.842,82.678 -11.842,82.497 -11.82,82.475 D339.4@-11.683,82.475
NetD310_1: D310.1 D340.4 | length 3.7
  Top Layer w0.09: D310.1@-9.96,85.823 -9.68,85.543 -9.68,85.488 -9.545,85.353 -9.545,83.067 -9.494,83.016 -9.494,82.961 -9.272,82.738 -9.272,82.557 -9.198,82.483 D340.4@-9.13,82.483
NetD311_1: D311.1 D341.4 | length 3.7
  Top Layer w0.09: D311.1@-7.407,85.823 -7.127,85.543 -7.127,85.488 -6.992,85.353 -6.992,83.124 -6.94,83.072 -6.94,83.017 -6.857,82.934 -6.857,82.763 D341.4@-6.577,82.483
NetD312_1: D312.1 D342.4 | length 3.7
  Top Layer w0.09: D312.1@-4.867,85.823 -4.587,85.543 -4.587,85.488 -4.452,85.353 -4.452,83.114 -4.425,83.087 -4.425,82.986 -4.317,82.878 -4.317,82.763 D342.4@-4.037,82.483
NetD313_1: D313.1 D343.4 | length 3.7
  Top Layer w0.09: D313.1@-2.31,85.823 -2.03,85.543 -2.03,85.329 -1.895,85.194 -1.895,83.137 -1.825,83.067 -1.825,83.012 -1.76,82.947 -1.76,82.808 -1.635,82.683 -1.635,82.608 -1.51,82.483 D343.4@-1.48,82.483
NetD314_1: D314.1 D344.4 | length 3.7
  Top Layer w0.09: D314.1@0.213,85.823 0.493,85.543 0.493,85.488 0.628,85.353 0.628,84.11 0.683,84.055 0.683,83.027 0.905,82.804 0.905,82.621 D344.4@1.043,82.483
NetD315_1: D315.1 D345.4 | length 3.7
  Top Layer w0.09: D315.1@2.753,85.823 3.033,85.543 3.033,85.488 3.223,85.298 3.223,83.027 3.303,82.947 3.303,82.763 D345.4@3.583,82.483
NetD316_1: D316.1 D346.4 | length 3.7
  Top Layer w0.09: D316.1@5.293,85.823 5.573,85.543 5.573,85.329 5.653,85.249 5.653,83.068 5.843,82.878 5.843,82.763 D346.4@6.123,82.483
NetD317_1: D317.1 D347.4 | length 3.7
  Top Layer w0.09: D317.1@7.84,85.823 8.12,85.543 8.12,85.488 8.255,85.353 8.255,84.11 8.31,84.055 8.31,83.027 8.532,82.804 8.532,82.621 D347.4@8.67,82.483
NetD318_1: D318.1 D348.4 | length 3.7
  Top Layer w0.09: D318.1@10.39,85.823 10.67,85.543 10.67,85.488 10.805,85.353 10.805,84.11 10.86,84.055 10.86,83.027 11.082,82.804 11.082,82.621 D348.4@11.22,82.483
NetD319_1: D319.1 D349.4 | length 3.7
  Top Layer w0.09: D319.1@12.89,85.823 13.17,85.543 13.17,85.488 13.305,85.353 13.305,84.11 13.36,84.055 13.36,83.027 13.582,82.804 13.582,82.621 D349.4@13.72,82.483
NetD320_1: D320.1 D350.4 | length 3.7
  Top Layer w0.09: D320.1@15.44,85.823 15.72,85.543 15.72,85.488 15.855,85.353 15.855,84.234 15.783,84.162 15.783,83.854 15.91,83.727 15.91,83.027 16.132,82.804 16.132,82.621 D350.4@16.27,82.483
NetD321_1: D321.1 D351.4 | length 3.7
  Top Layer w0.09: D321.1@17.99,85.823 18.27,85.543 18.27,85.488 18.405,85.353 18.405,83.127 18.445,83.087 18.445,83.032 18.667,82.809 18.667,82.628 18.812,82.483 D351.4@18.82,82.483
NetD322_1: D322.1 D352.4 | length 3.7
  Top Layer w0.09: D322.1@20.533,85.823 20.813,85.543 20.813,85.488 20.948,85.353 20.948,84.159 21.01,84.097 21.01,83.117 21.232,82.894 21.232,82.614 D352.4@21.363,82.483
NetD323_1: D323.1 D353.4 | length 3.7
  Top Layer w0.09: D323.1@23.04,85.783 23.32,85.503 23.32,85.448 23.455,85.313 23.455,84.115 23.51,84.06 23.51,83.077 23.732,82.854 23.732,82.581 D353.4@23.87,82.443
NetD324_1: D324.1 D354.4 | length 3.7
  Top Layer w0.09: D324.1@25.613,85.768 25.893,85.488 25.893,85.433 26.028,85.298 26.028,84.108 26.083,84.053 26.083,83.077 26.305,82.854 26.305,82.566 D354.4@26.443,82.428
NetD325_1: D325.1 D355.4 | length 3.7
  Top Layer w0.09: D325.1@28.14,85.783 28.42,85.503 28.42,85.448 28.555,85.313 28.555,84.115 28.61,84.06 28.61,83.077 28.832,82.854 28.832,82.581 D355.4@28.97,82.443
NetD326_1: D326.1 D356.4 | length 3.7
  Top Layer w0.09: D326.1@30.64,85.783 30.92,85.503 30.92,85.448 31.055,85.313 31.055,84.115 31.11,84.06 31.11,83.077 31.332,82.854 31.332,82.581 D356.4@31.47,82.443
NetD327_1: D327.1 D357.4 | length 3.7
  Top Layer w0.09: D327.1@33.19,85.783 33.47,85.503 33.47,85.448 33.605,85.313 33.605,84.115 33.66,84.06 33.66,83.077 33.882,82.854 33.882,82.581 D357.4@34.02,82.443
NetD328_1: D328.1 D358.4 | length 3.7
  Top Layer w0.09: D328.1@35.74,85.733 36.02,85.453 36.02,85.398 36.155,85.263 36.155,84.065 36.21,84.01 36.21,83.027 36.432,82.804 36.432,82.531 D358.4@36.57,82.393
NetD329_1: D329.1 D359.4 | length 3.7
  Top Layer w0.09: D329.1@38.29,85.733 38.57,85.453 38.57,85.398 38.705,85.263 38.705,84.115 38.648,84.058 38.648,83.75 38.705,83.693 38.705,82.923 38.84,82.788 38.84,82.673 D359.4@39.12,82.393
NetD359_1: D359.1 D360.4
NetD360_1: D360.1 D361.4 | length 3.7
  Top Layer w0.09: D360.1@-34.073,74.886 -33.658,75.301 -31.187,75.301 -30.937,75.551 -30.778,75.551 D361.4@-30.702,75.626
NetD361_1: D361.1 D362.4 | length 3.6
  Top Layer w0.09: D361.1@-31.51,74.886 -31.34,75.056 -31.163,75.056 -30.947,75.272 -28.751,75.272 -28.477,75.546 -28.227,75.546 D362.4@-28.168,75.606
NetD362_1: D362.1 D363.4 | length 3.6
  Top Layer w0.09: D362.1@-28.96,74.886 -28.79,75.056 -28.613,75.056 -28.374,75.296 -26.167,75.296 -25.927,75.536 -25.729,75.536 D363.4@-25.636,75.629
NetD363_1: D363.1 D364.4 | length 3.6
  Top Layer w0.09: D363.1@-26.41,74.876 -26.258,75.027 -26.107,75.027 -25.844,75.291 -23.741,75.291 -23.669,75.363 -23.614,75.363 -23.424,75.553 -23.171,75.553 D364.4@-23.149,75.574
NetD364_1: D364.1 D389.4 | length 3.9
  Top Layer w0.09: D364.1@-23.87,74.893 -23.59,75.173 -23.377,75.173 -23.297,75.253 -22.763,75.253 -22.68,75.17 -22.68,73.481 -23.051,73.11 -23.051,73.079 D389.4@-23.221,72.909
NetD365_1: D365.1 D366.4 | length 3.6
  Top Layer w0.09: D365.1@-18.71,75.019 -18.686,75.043 -18.439,75.043 -18.386,75.096 -18.386,75.152 -18.282,75.256 -17.176,75.256 -17.173,75.253 -16.067,75.253 -15.677,75.643 D366.4@-15.395,75.643
NetD366_1: D366.1 D367.4 | length 3.6
  Top Layer w0.09: D366.1@-16.16,74.983 -16.16,75.053 -16.15,75.063 -15.989,75.063 -15.899,75.153 -15.847,75.153 -15.747,75.253 -13.667,75.253 -13.557,75.363 -13.514,75.363 -13.41,75.467 -13.41,75.51 -13.277,75.643 -13.092,75.643 D367.4@-12.985,75.75
NetD367_1: D367.1 D368.4 | length 3.7
  Top Layer w0.09: D367.1@-13.76,74.983 -13.68,75.063 -13.387,75.063 -13.197,75.253 -12.165,75.253 -12.157,75.245 -11.125,75.245 -11.015,75.355 -10.929,75.355 -10.825,75.459 -10.825,75.545 -10.727,75.643 -10.53,75.643 D368.4@-10.418,75.755
NetD368_1: D368.1 D369.4 | length 3.7
  Top Layer w0.09: D368.1@-11.21,74.983 -11.087,74.983 -10.905,75.165 -10.85,75.165 -10.66,75.355 -8.921,75.355 -8.906,75.34 -8.394,75.34 -8.29,75.444 -8.29,75.497 -8.191,75.596 -8.047,75.596 -7.908,75.735 D369.4@-7.824,75.735
NetD369_1: D369.1 D394.4 | length 3.5
  Top Layer w0.127: D369.1@-8.66,74.983 -8.622,75.022 -8.311,75.022 -8.084,75.249 -7.556,75.249 -7.426,75.118 -7.426,73.627 D394.4@-7.83,73.223
NetD370_1: D370.1 D371.4 | length 3.7
  Top Layer w0.127: D370.1@-3.629,74.888 -3.477,75.039 -3.29,75.039 -3.036,75.293 -0.894,75.293 -0.641,75.546 -0.453,75.546 D371.4@-0.302,75.698
NetD371_1: D371.1 D372.4 | length 3.8
  Top Layer w0.127: D371.1@-1.132,74.868 -0.98,75.019 -0.793,75.019 -0.528,75.284 1.701,75.284 1.966,75.549 2.153,75.549 D372.4@2.305,75.7
NetD372_1: D372.1 D373.4 | length 3.7
  Top Layer w0.127: D372.1@1.475,74.87 1.626,75.022 1.814,75.022 2.08,75.287 4.155,75.287 4.388,75.52 4.576,75.52 D373.4@4.794,75.739
NetD373_1: D373.1 D374.4 | length 3.8
  Top Layer w0.127: D373.1@3.964,74.909 4.115,75.06 4.303,75.06 4.536,75.293 6.275,75.293 6.318,75.337 6.773,75.337 7.05,75.614 7.238,75.614 D374.4@7.389,75.766
NetD374_1: D374.1 D399.4 | length 3.6
  Top Layer w0.127: D374.1@6.559,74.936 6.711,75.087 6.899,75.087 7.126,75.314 7.653,75.314 7.83,75.138 7.83,73.726 D399.4@7.35,73.246
NetD375_1: D375.1 D376.4 | length 3.7
  Top Layer w0.127: D375.1@11.576,74.841 11.991,75.256 14.324,75.256 14.587,75.519 14.775,75.519 D376.4@14.926,75.671
NetD376_1: D376.1 D377.4 | length 3.8
  Top Layer w0.127: D376.1@14.096,74.841 14.248,74.992 14.436,74.992 14.699,75.256 16.928,75.256 17.206,75.533 17.393,75.533 D377.4@17.545,75.685
NetD377_1: D377.1 D378.4 | length 3.6
  Top Layer w0.127: D377.1@16.715,74.855 16.866,75.006 17.054,75.006 17.303,75.256 19.358,75.256 19.651,75.549 19.838,75.549 D378.4@19.99,75.7
NetD378_1: D378.1 D379.4 | length 3.8
  Top Layer w0.127: D378.1@19.16,74.87 19.312,75.022 19.499,75.022 19.748,75.27 21.999,75.27 22.248,75.519 22.435,75.519 D379.4@22.587,75.671
NetD379_1: D379.1 D404.4 | length 3.3
  Top Layer w0.127: D379.1@21.757,74.841 21.908,74.992 22.096,74.992 22.323,75.219 22.851,75.219 22.965,75.105 22.965,73.669 D404.4@22.62,73.323
NetD380_1: D380.1 D381.4 | length 3.6
  Top Layer w0.09: D380.1@27.04,75.033 27.04,75.065 27.043,75.068 27.224,75.068 27.447,75.291 28.019,75.291 29.702,75.291 29.87,75.459 29.87,75.49 30.073,75.693 D381.4@30.355,75.693
NetD381_1: D381.1 D382.4 | length 3.6
  Top Layer w0.09: D381.1@29.51,74.885 29.648,75.023 29.862,75.023 30.09,75.251 32.083,75.251 32.171,75.34 32.226,75.34 32.448,75.562 32.662,75.562 D382.4@32.8,75.7
NetD382_1: D382.1 D383.4 | length 3.6
  Top Layer w0.09: D382.1@31.97,74.87 32.25,75.15 32.464,75.15 32.584,75.27 34.591,75.27 34.631,75.31 34.686,75.31 34.83,75.454 35.044,75.454 D383.4@35.26,75.67
NetD383_1: D383.1 D384.4 | length 3.7
  Top Layer w0.09: D383.1@34.43,74.84 34.71,75.12 34.924,75.12 35.068,75.264 37.104,75.264 37.418,75.578 37.632,75.578 D384.4@37.77,75.716
NetD384_1: D384.1 D409.4 | length 3.5
  Top Layer w0.127: D384.1@37.09,75.033 37.09,75.036 37.091,75.037 37.279,75.037 37.549,75.307 38.25,75.307 38.324,75.233 38.324,73.677 D409.4@37.92,73.273
NetD385_3: D385.4 D386.1 | length 2.1
  Top Layer w0.127: D385.4@-33.281,73.092 -32.401,73.092 D386.1@-31.56,72.251
NetD386_3: D386.4 D387.1 | length 2.1
  Top Layer w0.09: D386.4@-30.73,73.081 -29.798,73.081 D387.1@-28.96,72.243
NetD387_3: D387.4 D388.1 | length 2.1
  Top Layer w0.09: D387.4@-28.13,73.073 -27.24,73.073 D388.1@-26.41,72.243
NetD388_3: D388.4 D389.1 | length 2
  Top Layer w0.09: D388.4@-25.58,73.073 -24.732,73.073 D389.1@-23.91,72.251
NetD390_3: D390.4 D391.1 | length 1.9
  Top Layer w0.127: D390.4@-17.88,73.223 -17.19,73.223 D391.1@-16.36,72.393
NetD391_3: D391.4 D392.1 | length 1.9
  Top Layer w0.127: D391.4@-15.33,73.223 -14.59,73.223 D392.1@-13.76,72.393
NetD392_3: D392.4 D393.1 | length 2.1
  Top Layer w0.127: D392.4@-12.93,73.223 -12.04,73.223 D393.1@-11.21,72.393
NetD393_3: D393.4 D394.1 | length 2.1
  Top Layer w0.127: D393.4@-10.38,73.223 -9.49,73.223 D394.1@-8.66,72.393
NetD395_3: D395.4 D396.1 | length 2.1
  Top Layer w0.127: D395.4@-2.8,73.246 -1.91,73.246 D396.1@-1.08,72.416
NetD396_3: D396.4 D397.1 | length 2.1
  Top Layer w0.127: D396.4@-0.25,73.246 0.64,73.246 D397.1@1.47,72.416
NetD397_3: D397.4 D398.1 | length 2
  Top Layer w0.127: D397.4@2.3,73.246 3.14,73.246 D398.1@3.97,72.416
NetD398_3: D398.4 D399.1 | length 2.1
  Top Layer w0.127: D398.4@4.8,73.246 5.69,73.246 D399.1@6.52,72.416
NetD400_3: D400.4 D401.1 | length 2
  Top Layer w0.127: D400.4@12.443,73.266 13.316,73.266 D401.1@14.14,72.443
NetD401_3: D401.4 D402.1 | length 2.1
  Top Layer w0.127: D401.4@14.97,73.273 15.86,73.273 D402.1@16.69,72.443
NetD402_3: D402.4 D403.1 | length 2
  Top Layer w0.127: D402.4@17.52,73.273 18.46,73.273 D403.1@19.24,72.493
NetD403_3: D403.4 D404.1 | length 2.1
  Top Layer w0.127: D403.4@20.07,73.323 20.96,73.323 D404.1@21.79,72.493
NetD405_3: D405.4 D406.1 | length 2.1
  Top Layer w0.127: D405.4@27.87,73.273 28.76,73.273 D406.1@29.59,72.443
NetD406_3: D406.4 D407.1 | length 1.9
  Top Layer w0.127: D406.4@30.42,73.273 31.16,73.273 D407.1@31.99,72.443
NetD407_3: D407.4 D408.1 | length 2.1
  Top Layer w0.127: D407.4@32.82,73.273 33.71,73.273 D408.1@34.54,72.443
NetD408_3: D408.4 D409.1 | length 2.1
  Top Layer w0.127: D408.4@35.37,73.273 36.26,73.273 D409.1@37.09,72.443
NetJ1_A5: J1.A5 R2.1 | length 7.2
  Top Layer w0.127: J1.A5@25.881,154.285 25.881,155.913 cw(c26.381,155.913) 26.381,156.413 30.187,156.413 cw(c30.187,156.12) 30.48,156.12 30.48,155.682 ccw(c30.505,155.682) R2.1@30.505,155.658
NetJ1_B5: J1.B5 R3.1 | length 6.6
  Top Layer w0.127: R3.1@18.805,155.61 18.805,156.06 cw(c19.157,156.06) 19.157,156.413 22.23,156.413 cw(c22.23,155.762) 22.881,155.762 J1.B5@22.881,154.285
NetJ6_3: J6.3 JP5.1
NetR4_2: R4.2 U3.3 | length 1.8
  Top Layer w0.5: R4.2@10.405,155.908 10.505,155.808 10.505,154.658 10.705,154.458 U3.3@10.93,154.458
NetR5_2: R5.2 U4.15 | length 2.1
  Bottom Layer w0.127: U4.15@17.855,151.152 17.855,151.658 ccw(c17.512,151.845) 17.855,152.032 17.855,152.115 18.255,152.515 R5.2@18.811,152.515
NetR14_1: R14.1 U18.1 U18.2 | length 18.9
  Bottom Layer w0.127: U18.2@-30.485,127.983 -30.485,129.377 -30.004,129.858 -18.599,129.858 -17.149,128.408 R14.1@-15.045,128.408
  Bottom Layer w0.5: U18.1@-31.755,127.983 U18.2@-30.485,127.983
NetR18_1: R18.1 U19.7 U26.31 | length 2.3
  Bottom Layer w0.5: R18.1@27.755,72.038 cw(c27.809,72.038) 27.809,72.093 U19.7@30.03,72.093
NetR18_2: R18.2 TP7.1 U19.8 U26.30 | length 3.8
  Bottom Layer w0.5: TP7.1@27.703,74.931 cw(c27.703,74.879) 27.755,74.879 R18.2@27.755,73.538 ccw(c27.93,73.538) 27.93,73.363 U19.8@30.03,73.363
NetR21_1: R21.1 TP10.1 U20.7 | length 3.4
  Bottom Layer w0.5: TP10.1@-34.595,72.008 -33.345,72.008 ccw(c-33.345,72.108) R21.1@-33.245,72.108 -31.22,72.108 U20.7@-31.22,72.093
NetR22_1: R22.1 U18.8 U18.9 | length 10.7
  Bottom Layer w0.127: U18.8@-24.135,122.333 -17.995,122.333 -17.478,122.85 R22.1@-14.955,122.85
  Bottom Layer w0.5: U18.9@-25.405,122.333 U18.8@-24.135,122.333
NetR24_1: R24.1 U18.13 U18.14 | length 19
  Bottom Layer w0.127: U18.13@-30.485,122.333 -30.485,120.292 -30.078,119.885 -18.367,119.885 -18.314,119.938 R24.1@-14.995,119.938
  Bottom Layer w0.5: U18.14@-31.755,122.333 U18.13@-30.485,122.333
NetR26_1: R26.1 R27.2 R28.2 | length 4.3
  Bottom Layer w0.127: R28.2@33.005,120.058 33.085,120.058 33.419,119.724 33.419,119.644 33.92,119.143 33.92,118.896 34.254,118.562 R27.2@34.334,118.562 34.414,118.562 34.748,118.896 34.748,119.101 35.291,119.644 35.291,119.724 35.624,120.058 R26.1@35.705,120.058
NetR27_1: R27.1 R31.2 U21.11 | length 8.3
  Bottom Layer w0.127: U21.11@34.21,122.292 34.21,123.475 34.41,123.675 37.387,123.675 38.455,122.608 R31.2@38.555,122.608
  Bottom Layer w0.5: U21.11@34.21,122.292 34.21,120.186 R27.1@34.334,120.062
NetR31_1: R31.1 R32.2 | length 1.2
  Bottom Layer w0.5: R31.1@38.555,124.108 38.58,124.133 38.58,125.283 R32.2@38.605,125.308
NetR33_1: R33.1 U18.6 U18.7 | length 11.3
  Bottom Layer w0.127: U18.7@-24.135,127.983 -19.329,127.983 -17.149,125.803 R33.1@-14.99,125.803
  Bottom Layer w0.5: U18.6@-25.405,127.983 U18.7@-24.135,127.983
NetR40_2: R40.2 U13.2 | length 2.7
  Top Layer w0.127: R40.2@26.109,138.756 26.844,138.756 27.666,137.935 U13.2@28.453,137.935
NetR41_1: R41.1 R42.3 R43.2 | length 7.3
  Top Layer w0.127: R42.3@46.06,133.56 46.06,134.781 46.635,135.356 48.665,135.356 49.226,135.916 49.619,135.916 49.705,136.002 R41.1@49.705,136.558 R43.2@51.055,136.558
NetR44_1: R44.1 R45.3 R46.2 | length 8.2
  Top Layer w0.127: R46.2@41.746,148.831 R46.2@41.786,148.791 ; R46.2@41.786,148.783 42.207,149.204 42.207,149.648 41.866,149.989 41.866,150.409 43.392,151.935 43.915,151.935 R45.3@44.519,151.331
  Top Layer w0.2: R44.1@39.805,148.57 39.879,148.496 R44.1@39.879,148.481 40.424,149.026 40.529,149.026 41.221,148.334 41.326,148.334 R46.2@41.775,148.783
NetU18_3: U18.3 U23.24 U26.29 | length 17.7
  Bottom Layer w0.09: U23.24@-10.048,102.548 -3.758,102.548 0.026,106.331 0.026,106.758 0.21,106.943 3.132,106.943 3.527,106.548 U26.29@3.952,106.548
  Bottom Layer w0.127: v1(-29.215,126.541) U18.3@-29.215,127.983
NetU18_5: U18.5 U26.26 | length 1.4
  Bottom Layer w0.127: v1(-26.675,126.541) U18.5@-26.675,127.983
NetU18_10: U18.10 U24.24 U26.28 | length 33.4
  Int2 (Sign) w0.09: v1(-7.949,84.823) -5.586,87.186 -5.586,88.174 v1(-5.636,88.225) ; v1(-5.233,96.86) -5.233,96.902 -5.449,97.118 -5.449,98.415 -5.026,98.838 -3.729,98.838 -3.539,98.648 v1(-3.455,98.648) ; v1(-0.384,101.864) -0.384,102.667 -0.206,102.845 -0.206,104.222 -0.32,104.335 v1(-0.32,104.419)
  Int4 (PWR) w0.09: v1(-5.636,88.225) -5.636,88.309 -5.753,88.426 -5.753,96.31 -5.233,96.83 v1(-5.233,96.86)
  Bottom Layer w0.09: U24.24@-9.93,84.823 v1(-7.949,84.823) ; v1(-3.455,98.648) -3.413,98.69 -3.413,98.983 -3.108,99.288 -3.108,100.748 -2.579,101.276 -0.972,101.276 v1(-0.384,101.864) ; v1(-0.32,104.419) -0.32,104.46 0.538,105.318 0.662,105.318 0.687,105.343 2.157,105.343 2.182,105.318 3.192,105.318 3.217,105.343 3.547,105.343 U26.28@3.952,105.748
  Bottom Layer w0.127: U18.10@-26.675,122.333 v1(-26.675,123.622)
NetU18_12: U18.12 U25.2 U26.27 | length 25.7
  Int2 (Sign) w0.09: v1(9.095,99.011) 9.099,99.015 10.563,99.015 10.697,98.88 12.105,98.88 v1(12.236,99.011) 13.729,99.011 14.624,98.115 v1(14.624,95.859)
  Int3 (Sign) w0.09: v1(5.23,99.085) v1@5.235,99.09 ; v1@5.235,99.091 5.316,99.011 v1(9.095,99.011) ; v1(14.505,94.32) 14.505,94.404 14.624,94.523 v1(14.624,95.859)
  Int4 (PWR) w0.09: v1(4.894,104.774) 4.894,99.42 v1(5.23,99.085)
  Bottom Layer w0.09: U26.27@3.952,104.948 4.126,104.774 v1(4.894,104.774) ; v1(14.505,94.32) 14.505,91.802 15.1,91.208 U25.2@15.525,91.208
  Bottom Layer w0.127: U18.12@-29.215,122.333 v1(-29.215,123.622)
OSC_PROBE_1: J7.1 U25.5
QSPI_SCLK_5: U13.52 U14.6 | length 7.4
  Top Layer w0.127: U14.6@26.095,142.385 26.095,141.245 26.482,140.858 30.142,140.858 30.857,140.143 U13.52@30.857,139.138
QSPI_SD1_5: U13.55 U14.2 | length 19.5
  Top Layer w0.127: U14.2@27.365,147.835 27.365,148.901 27.031,149.235 24.381,149.235 23.717,148.571 23.717,141.547 25.236,140.029 29.427,140.029 29.657,139.799 U13.55@29.657,139.138
QSPI_SD2_5: U13.54 U14.3 | length 17.9
  Top Layer w0.127: U14.3@26.095,147.835 26.095,148.751 25.837,149.008 24.475,149.008 23.944,148.477 23.944,141.671 25.359,140.256 29.83,140.256 30.057,140.029 U13.54@30.057,139.138
QSPI_SD3_5: U13.51 U14.7 | length 6.4
  Top Layer w0.127: U14.7@27.365,142.385 27.484,142.266 27.484,141.544 27.91,141.118 30.457,141.118 31.257,140.318 U13.51@31.257,139.138
QSPI_SDO_5: U13.53 U14.5 | length 8.2
  Top Layer w0.127: U14.5@24.825,142.385 24.825,141.285 25.567,140.543 29.967,140.543 30.457,140.053 U13.53@30.457,139.138
QSPI_SS_5: R9.1 R10.1 U13.56 U14.1 | length 24.9
  Top Layer w0.127: R9.1@22.055,139.081 R10.1@23.325,139.081 23.425,139.081 24.145,139.802 25.142,139.802 ; U14.1@28.635,147.835 28.635,149.235 28.17,149.7 24.48,149.7 23.49,148.71 23.49,141.45 24.41,140.53 24.413,140.53 25.142,139.802 ; U13.56@29.257,139.138 29.257,139.727 29.182,139.802 25.142,139.802